# EAGLE board powerBoard (EAGLE 7.4.0)
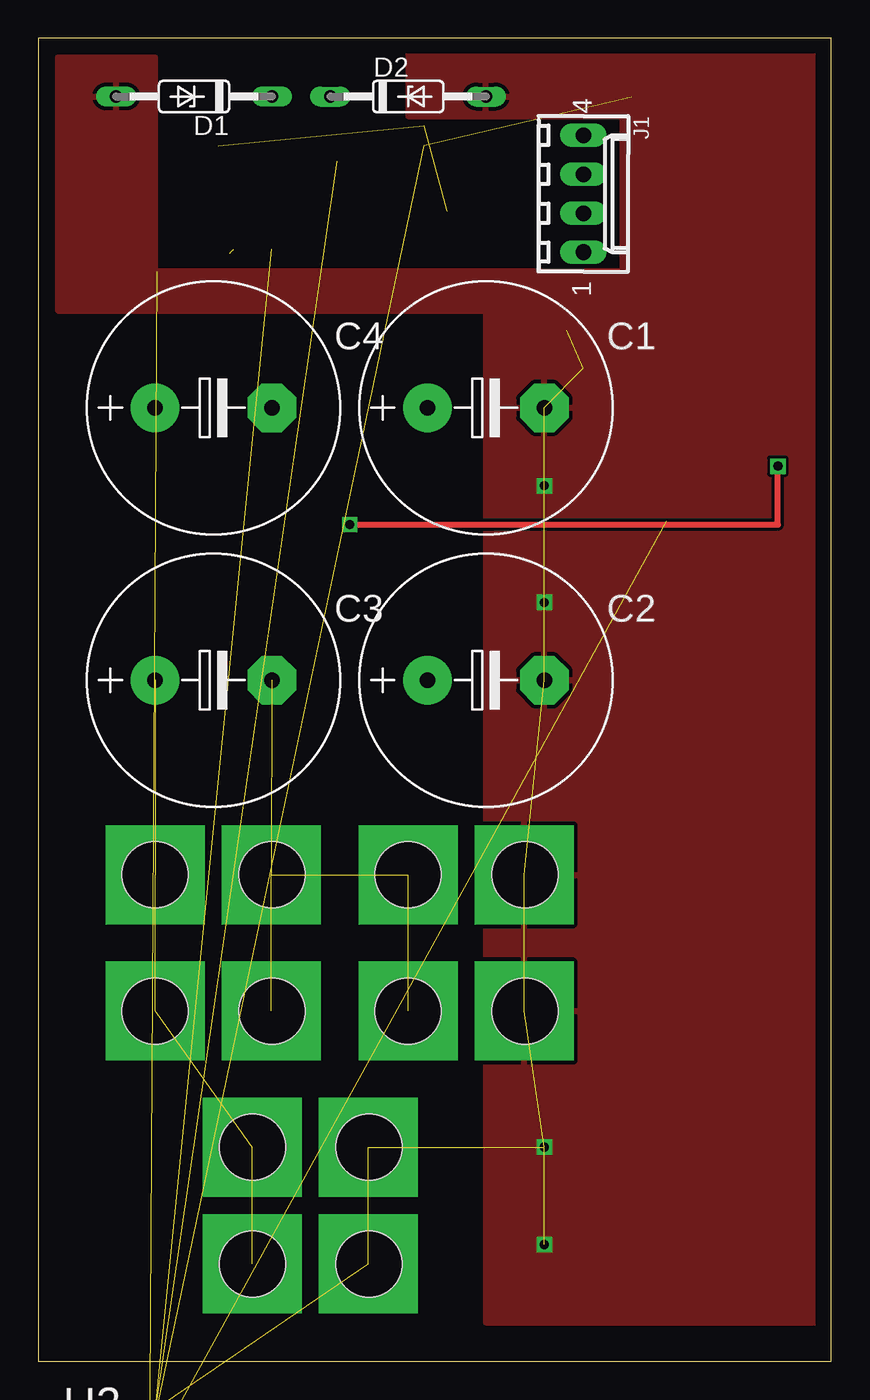
[diagram p0: board, top side]
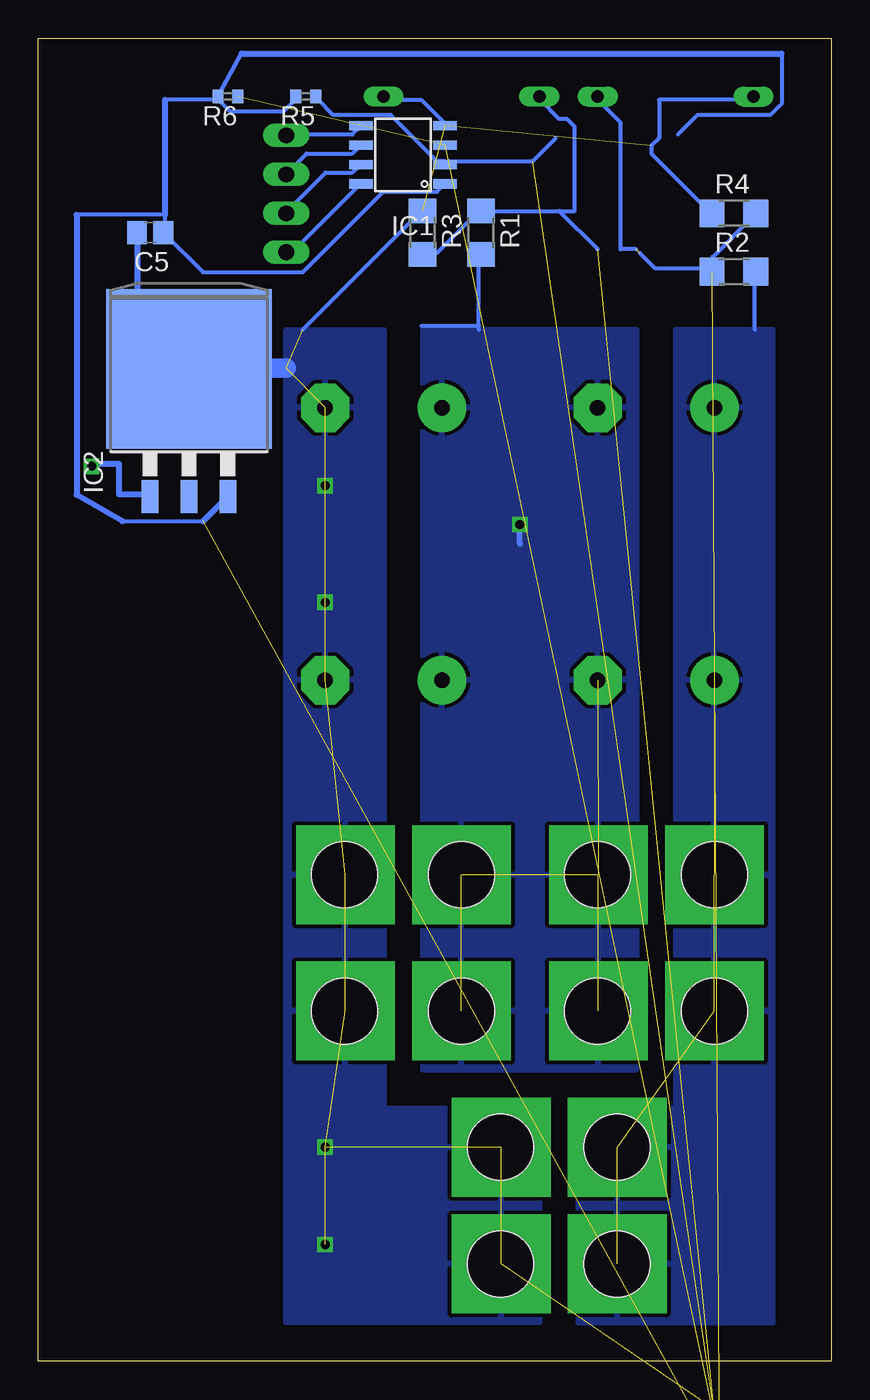
[diagram p1: board, bottom side, seen from below]

Size 51.74 x 86.35 mm. Coordinates in mm from the lower left corner, seen from the top.
Outline: 0,0 51.74,0 51.74,86.35 0,86.35 0,0
Copper layers (1*16): Top 0.035mm / dielectric 1.5mm / Bottom 0.035mm
Design rules "default": minimum track width 10mil, minimum drill 24mil, track to track 8mil, track to pad 8mil, pad to pad 8mil, via to via 8mil, smd to smd 8mil, copper to edge 40mil, drill to drill 8mil, minimum pad ring 10mil, minimum via ring 8mil, stop-mask expansion 4mil, vias tented up to drill 0mil, thermal gap 10mil
Net classes: 0 default: width 0.076 mm, drill 0.102 mm, clearance 0.076 mm; 1 GND: width 0.127 mm, clearance 0.127 mm

## Footprints (pad centres in the part's own frame; a part is rotated, then mirrored left to right if it is on the bottom)
E7,5-16 = drill 1.016 pad 3.15: + -3.81,0 | drill 1.016 pad 3.15 octagon: - 3.81,0
C2012 = smd 1.3 x 1.5: 1 -0.85,0; 2 0.85,0
DO35Z10 = drill 0.813 long: A 5.08,0; C -5.08,0
SO8-COOL = smd 0.61 x 1.524: 1 -1.905,-2.743; 2 -0.635,-2.743; 3 0.635,-2.743; 4 1.905,-2.743; 5 1.905,2.743; 6 0.635,2.743; 7 -0.635,2.743; 8 -1.905,2.743
TO263-3 = smd 1.067 x 2.159: 1 -2.54,-5.791; 2 0,-5.791; 3 2.54,-5.791 | smd 10.8 x 10.41: TAB 0,2.54
6410-04 = drill 1.016 long: 1 3.81,0; 2 1.27,0; 3 -1.27,0; 4 -3.81,0
10X03MTA = drill 1.016 long: 1 2.54,0; 2 0,0; 3 -2.54,0
R1206 = smd 1.6 x 1.803: 1 -1.422,0; 2 1.422,0
R1005 = smd 0.7 x 0.9: 1 -0.65,0; 2 0.65,0
SOP50P490X110-10N = smd 1.422 x 0.279: 1 -2.184,0.991; 2 -2.184,0.508; 3 -2.184,0; 4 -2.184,-0.508; 5 -2.184,-0.991; 6 2.184,-0.991; 7 2.184,-0.508; 8 2.184,0; 9 2.184,0.508; 10 2.184,0.991
XT60 = drill 4.3 pad 6.452 square: P$1 3.76,0; P$2 -3.81,0 | hole 4.3: 3.81,0; -3.81,0

## Placement (x,y rotation side)
C1  [E7,5-16]  29.21,62.23 0 top
C2  [E7,5-16]  29.21,44.45 0 top
C3  [E7,5-16]  11.43,44.45 0 top
C4  [E7,5-16]  11.43,62.23 0 top
C5  [C2012]  44.45,73.66 180 bottom
D1  1N821  [DO35Z10]  10.16,82.55 180 top
D2  1N821  [DO35Z10]  24.13,82.55 0 top
IC1  ADUM1250  [SO8-COOL]  27.94,78.74 90 bottom
IC2  LM340S-12  [TO263-3]  41.91,62.23 0 bottom
J1  22-27-2041-04  [6410-04]  35.56,76.2 270 top
J2  [10X03MTA]  5.08,-16.51 0 top  (outside the outline)
J3  [10X03MTA]  5.08,-24.13 0 top  (outside the outline)
R1  [R1206]  22.86,73.66 270 bottom
R2  [R1206]  6.35,71.12 0 bottom
R3  [R1206]  26.67,73.66 270 bottom
R4  [R1206]  6.35,74.93 0 bottom
R5  [R1005]  34.29,82.55 180 bottom
R6  [R1005]  39.37,82.55 180 bottom
U2  ADS1115IDGST  [SOP50P490X110-10N]  5.08,-6.35 0 top  (outside the outline)
U$1  XT60  [XT60]  27.94,22.86 0 top
U$2  XT60  [XT60]  11.43,31.75 0 top
U$3  XT60  [XT60]  11.43,22.86 0 top
U$4  XT60  [XT60]  27.94,31.75 0 top
U$5  XT60  [XT60]  17.78,13.97 0 top
U$6  XT60  [XT60]  17.78,6.35 0 top

## Library data of the parts
C1-C4 = rcl
C5 = eagle-ltspice; SPICEMODEL: NONE; SPICEPREFIX: C
D1 D2 = diode
IC1 = analog-devices-3
IC2 = linear
J1 = con-molex; OC_FARNELL: unknown; OC_NEWARK: unknown
J2 J3 = con-amp
R1-R6 = eagle-ltspice; SPICEMODEL: NONE; SPICEPREFIX: R
U2 = Texas Instruments_By_element14_Batch_1; MPN: ADS1115IDGST; OC_FARNELL: 1762981; OC_NEWARK: 25R1241; PACKAGE: MSOP-10; SUPPLIER: Texas Instruments
U$1-U$6 = hans

## Nets
GND: C1.- C2.- C5.2 D1.A D2.A IC1.4 IC2.TAB J2.3 J3.3 R3.1 R4.1 U2.3 U$1.P$1 U$4.P$1 U$5.P$1 U$6.P$1
GND2: IC1.5 J1.4
MID: C1.+ C2.+ C3.- C4.- IC2.1 R1.2 U$1.P$2 U$2.P$1 U$3.P$1 U$4.P$2
N$3: J2.1 U2.4
N$4: J3.1 U2.5
N$5: IC1.3 R6.1 U2.10
N$7: D1.C R2.1 R4.2 U2.6
N$10: IC1.2 R5.1 U2.9
N$11: IC1.7 J1.2
N$12: IC1.6 J1.3
N$14: D2.C R1.1 R3.2 U2.7
POS: C3.+ C4.+ R2.2 U$2.P$2 U$3.P$2 U$5.P$2 U$6.P$2
VDD1: C5.1 IC1.1 IC2.3 J2.2 J3.2 R5.2 R6.2 U2.8
VDD2: IC1.8 J1.1

## Tracks (layer width: path | path; a pad name or v marks a point on that pad's centre or on a via)
GND  (via drill 0.6)  (16 unrouted)
  Bottom 0.254: 45.24,64.83 41.99,64.83 IC2.TAB 41.74,64.83 | 45.24,73.58 C5.2 | IC1.4 25.24,80.83 26.74,82.33 28.99,82.33 D2.A | R4.1 7.99,75.08 11.74,78.83 11.74,79.33 11.24,79.83 11.24,82.33 5.24,82.33 D1.A | R3.1 26.74,75.08 34.49,67.33 34.49,67.31
  Bottom 0.406: 45.24,64.83 45.24,73.58
  Bottom 1.27: 35.56,64.83 41.74,64.83
  other vias: 33.02,57.15 33.02,49.53 33.02,13.97 33.02,7.62
  pour Bottom: 19.05,16.51 19.05,2.54 35.56,2.54 35.56,67.31 29.21,67.31 29.21,16.51
  pour Top: 1.27,85.09 1.27,69.85 1.27,68.58 29.21,68.58 29.21,2.54 52.07,2.54 52.07,3.81 52.07,86.36 24.13,86.36 24.13,81.28 38.1,81.28 38.1,71.12 7.62,71.12 7.62,85.09
GND2
  Bottom 0.254: IC1.5 30.74,80.58 31.24,80.08 35.49,80.08 J1.4
MID  (via drill 0.6)  (4 unrouted)
  Top 0.406: v20.32,54.61 48.26,54.61 v48.26,58.42
  Bottom 0.254: 22.99,67.31 22.99,67.58 | 22.99,67.58 22.99,72.08 R1.2 | 48.24,58.33 v48.26,58.42 48.24,58.58 | 44.49,56.58 IC2.1 | 26.74,67.58 22.99,67.58
  Bottom 0.406: 44.49,56.58 46.49,56.58 46.49,58.58 48.24,58.58 48.26,58.58 | 20.32,53.34 v20.32,54.61
  pour Bottom: 12.7,19.05 12.7,67.31 26.67,67.31 26.67,19.05
N$3  (1 unrouted)
N$4  (1 unrouted)
N$5  (2 unrouted)
N$7  (2 unrouted)
  Bottom 0.254: R4.2 4.99,74.83 7.74,72.08 7.74,71.33 R2.1 7.99,71.33 11.49,71.33 12.49,72.33 | 12.74,72.58 13.74,72.58 13.74,80.83 15.24,82.33 D1.C
N$10  (1 unrouted)
  Bottom 0.254: R5.1 33.49,82.33 32.49,81.33 28.74,81.33 25.74,78.33 25.24,78.33 IC1.2 24.99,78.33 19.49,78.33 17.99,79.83
N$11
  Bottom 0.254: IC1.7 30.74,78.08 31.24,77.58 32.99,77.58 35.49,75.08 J1.2
N$12
  Bottom 0.254: IC1.6 30.74,79.33 31.24,78.83 34.24,78.83 35.49,77.58 J1.3
N$14  (1 unrouted)
  Bottom 0.254: R3.2 26.49,72.33 25.74,72.33 22.99,75.08 R1.1 22.74,75.08 17.74,75.08 | 17.74,75.08 15.24,72.58 | 17.74,75.08 16.74,75.08 16.74,80.58 17.24,81.08 17.74,81.08 18.99,82.33 D2.C
POS  (4 unrouted)
  Bottom 0.254: 4.99,67.31 4.99,71.08 R2.2
  pour Bottom: 16.51,16.51 16.51,2.54 3.81,2.54 3.81,67.31 10.16,67.31 10.16,16.51
VDD1  (3 unrouted)
  Bottom 0.254: R5.2 34.99,82.33 35.74,81.58 39.24,81.58 39.99,82.33 R6.2 | 43.49,82.33 40.24,82.33 R6.2 | IC1.1 25.24,76.83 25.74,76.33 29.24,76.33 34.49,71.08 40.99,71.08 43.49,73.58 C5.1 43.49,73.83 43.49,74.83 49.24,74.83 | 46.24,54.83 40.99,54.83 | 39.49,56.33 IC2.3 | 9.99,80.08 8.74,81.33 3.99,81.33 3.24,82.08 3.24,85.35 | R6.2 38.49,85.35
  Bottom 0.406: 43.49,82.33 43.49,74.83 | 40.99,54.83 39.49,56.33 | 46.24,54.83 49.24,56.56 49.24,74.83 | 38.49,85.35 3.24,85.35
VDD2
  Bottom 0.254: IC1.8 30.74,76.83 34.99,72.58 35.49,72.58 J1.1